# Altium PCB KNX-RELAY-8CH_V2.PcbDoc
Units mm, origin at the board's own origin, x right, y up, seen from the top; angles counter-clockwise.
Board outline 152.4 x 101.6 mm, 2 copper layers (F.Cu, B.Cu); 103 components, 0 nets, 303 pads, 256 vias.
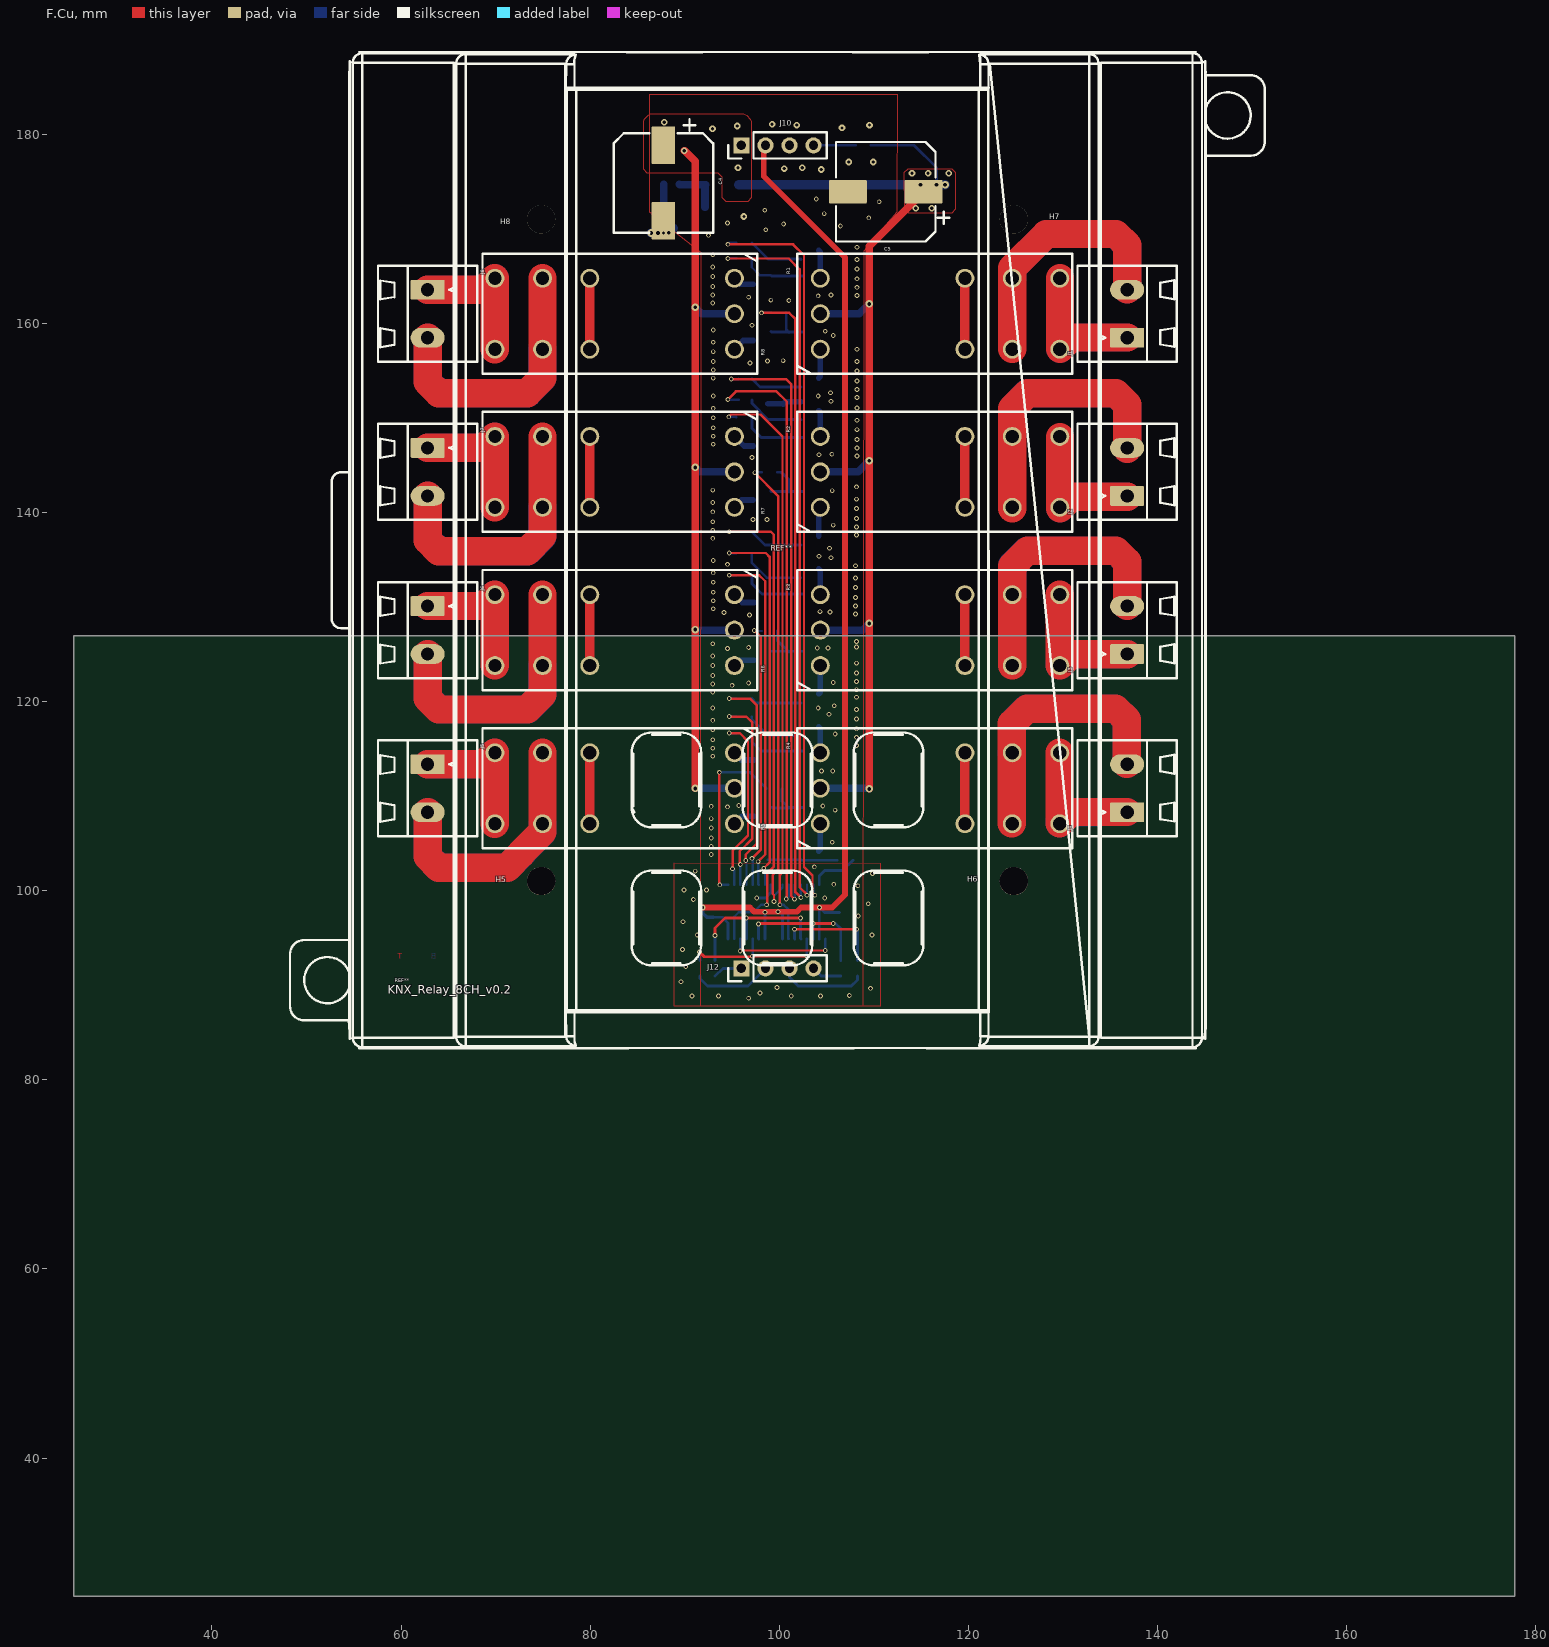
[diagram p0: F.Cu view]
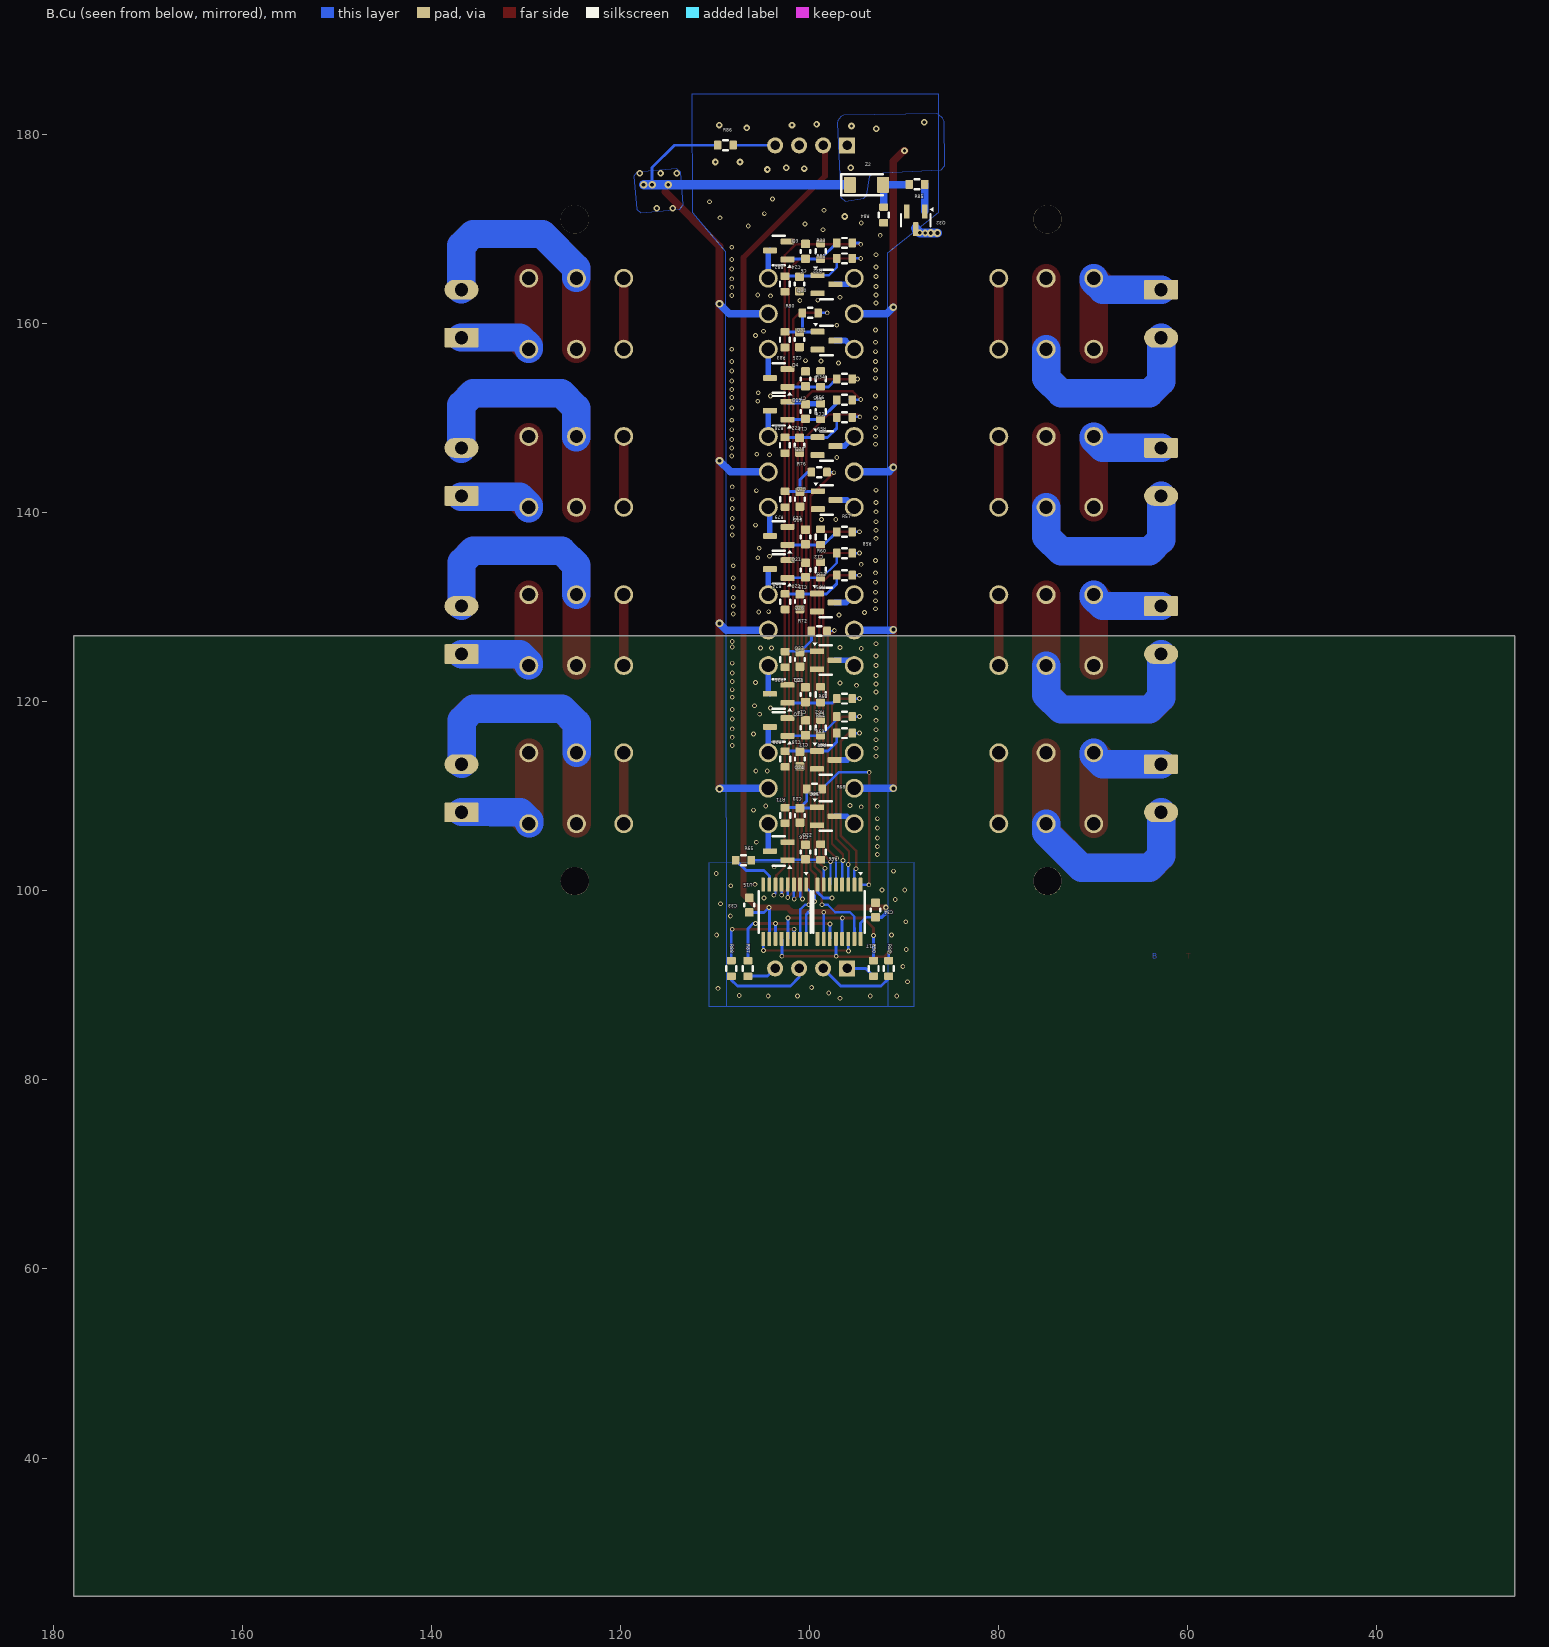
[diagram p1: B.Cu view, seen from below]

## Layer stack, top to bottom
F.Mask: solder mask 0.0102, Solder Resist, Dk 3.5
F.Cu: signal copper 0.0356
Dielectric 1: dielectric 0.32, FR-4, Dk 4.8
B.Cu: signal copper 0.0356
B.Mask: solder mask 0.0102, Solder Resist, Dk 3.5

## Board outline
25.4,25.4 177.8,25.4 177.8,127 25.4,127

## Design rules (kind name [scope] priority, off if disabled: settings)
Clearance "Clearence 0,5_Polygon" [InNamedPolygon('F.Cu-') OR InNamedPolygon('B.Cu-') OR InNamedPolygon('F.Cu--1') OR InNamedPolygon('B.Cu--1')] p1: gap=0.5 ignorepadtopadclearanceinfootprint=FALSE
Clearance "Clearence 0,4_Polygon" [InNamedPolygon('F.Cu--2') OR InNamedPolygon('B.Cu--2')] p2: gap=0.4 ignorepadtopadclearanceinfootprint=FALSE
Clearance "Clearence 0,3_Polygon" [InNamedPolygon('F.Cu--3') OR InNamedPolygon('B.Cu--3')] p3: gap=0.3 ignorepadtopadclearanceinfootprint=FALSE
Clearance "Clearence 0,2_NetClass" [InNetClass('Default')] p4: gap=0.2 ignorepadtopadclearanceinfootprint=FALSE
MinimumSolderMaskSliver [All] p1: minsoldermaskwidth=0
PolygonConnect Polygon_B.Cu--3_ConnectDirect [IsNamedPolygon('B.Cu--3') vs IsVia] p1: connectstyle=Direct reliefconductorwidth=0.254 reliefentries=4 polygonreliefangle="90 Angle" airgapwidth=0.254
PolygonConnect Polygon_B.Cu--3_ConnectRelief45 [IsNamedPolygon('B.Cu--3') vs (IsThruPin or IsSMTPin) and (PadShape_AllLayers = 'Round')] p2: connectstyle=Relief reliefconductorwidth=0.3 reliefentries=4 polygonreliefangle="45 Angle" airgapwidth=0.3
PolygonConnect Polygon_B.Cu--3_ConnectRelief90 [IsNamedPolygon('B.Cu--3') vs (IsThruPin or IsSMTPin) and (PadShape_AllLayers <> 'Round')] p3: connectstyle=Relief reliefconductorwidth=0.3 reliefentries=4 polygonreliefangle="90 Angle" airgapwidth=0.3
PolygonConnect Polygon_F.Cu--3_ConnectDirect [IsNamedPolygon('F.Cu--3') vs IsVia] p4: connectstyle=Direct reliefconductorwidth=0.254 reliefentries=4 polygonreliefangle="90 Angle" airgapwidth=0.254
PolygonConnect Polygon_F.Cu--3_ConnectRelief45 [IsNamedPolygon('F.Cu--3') vs (IsThruPin or IsSMTPin) and (PadShape_AllLayers = 'Round')] p5: connectstyle=Relief reliefconductorwidth=0.3 reliefentries=4 polygonreliefangle="45 Angle" airgapwidth=0.3
PolygonConnect Polygon_F.Cu--3_ConnectRelief90 [IsNamedPolygon('F.Cu--3') vs (IsThruPin or IsSMTPin) and (PadShape_AllLayers <> 'Round')] p6: connectstyle=Relief reliefconductorwidth=0.3 reliefentries=4 polygonreliefangle="90 Angle" airgapwidth=0.3
PolygonConnect Polygon_B.Cu--2_ConnectDirect [IsNamedPolygon('B.Cu--2') vs IsVia] p7: connectstyle=Direct reliefconductorwidth=0.254 reliefentries=4 polygonreliefangle="90 Angle" airgapwidth=0.254
PolygonConnect Polygon_B.Cu--2_ConnectRelief45 [IsNamedPolygon('B.Cu--2') vs (IsThruPin or IsSMTPin) and (PadShape_AllLayers = 'Round')] p8: connectstyle=Relief reliefconductorwidth=0.3 reliefentries=4 polygonreliefangle="45 Angle" airgapwidth=0.3
PolygonConnect Polygon_B.Cu--2_ConnectRelief90 [IsNamedPolygon('B.Cu--2') vs (IsThruPin or IsSMTPin) and (PadShape_AllLayers <> 'Round')] p9: connectstyle=Relief reliefconductorwidth=0.3 reliefentries=4 polygonreliefangle="90 Angle" airgapwidth=0.3
PolygonConnect Polygon_F.Cu--2_ConnectDirect [IsNamedPolygon('F.Cu--2') vs IsVia] p10: connectstyle=Direct reliefconductorwidth=0.254 reliefentries=4 polygonreliefangle="90 Angle" airgapwidth=0.254
PolygonConnect Polygon_F.Cu--2_ConnectRelief45 [IsNamedPolygon('F.Cu--2') vs (IsThruPin or IsSMTPin) and (PadShape_AllLayers = 'Round')] p11: connectstyle=Relief reliefconductorwidth=0.3 reliefentries=4 polygonreliefangle="45 Angle" airgapwidth=0.3
PolygonConnect Polygon_F.Cu--2_ConnectRelief90 [IsNamedPolygon('F.Cu--2') vs (IsThruPin or IsSMTPin) and (PadShape_AllLayers <> 'Round')] p12: connectstyle=Relief reliefconductorwidth=0.3 reliefentries=4 polygonreliefangle="90 Angle" airgapwidth=0.3
PolygonConnect Polygon_B.Cu--1_ConnectDirect [IsNamedPolygon('B.Cu--1') vs IsVia] p13: connectstyle=Direct reliefconductorwidth=0.254 reliefentries=4 polygonreliefangle="90 Angle" airgapwidth=0.254
PolygonConnect Polygon_B.Cu--1_ConnectRelief45 [IsNamedPolygon('B.Cu--1') vs (IsThruPin or IsSMTPin) and (PadShape_AllLayers = 'Round')] p14: connectstyle=Relief reliefconductorwidth=0.5 reliefentries=4 polygonreliefangle="45 Angle" airgapwidth=0.5
PolygonConnect Polygon_B.Cu--1_ConnectRelief90 [IsNamedPolygon('B.Cu--1') vs (IsThruPin or IsSMTPin) and (PadShape_AllLayers <> 'Round')] p15: connectstyle=Relief reliefconductorwidth=0.5 reliefentries=4 polygonreliefangle="90 Angle" airgapwidth=0.5
PolygonConnect Polygon_F.Cu--1_ConnectDirect [IsNamedPolygon('F.Cu--1') vs IsVia] p16: connectstyle=Direct reliefconductorwidth=0.254 reliefentries=4 polygonreliefangle="90 Angle" airgapwidth=0.254
PolygonConnect Polygon_F.Cu--1_ConnectRelief45 [IsNamedPolygon('F.Cu--1') vs (IsThruPin or IsSMTPin) and (PadShape_AllLayers = 'Round')] p17: connectstyle=Relief reliefconductorwidth=0.5 reliefentries=4 polygonreliefangle="45 Angle" airgapwidth=0.5
PolygonConnect Polygon_F.Cu--1_ConnectRelief90 [IsNamedPolygon('F.Cu--1') vs (IsThruPin or IsSMTPin) and (PadShape_AllLayers <> 'Round')] p18: connectstyle=Relief reliefconductorwidth=0.5 reliefentries=4 polygonreliefangle="90 Angle" airgapwidth=0.5
PolygonConnect Polygon_B.Cu-_ConnectDirect [IsNamedPolygon('B.Cu-') vs IsVia] p19: connectstyle=Direct reliefconductorwidth=0.254 reliefentries=4 polygonreliefangle="90 Angle" airgapwidth=0.254
PolygonConnect Polygon_B.Cu-_ConnectRelief45 [IsNamedPolygon('B.Cu-') vs (IsThruPin or IsSMTPin) and (PadShape_AllLayers = 'Round')] p20: connectstyle=Relief reliefconductorwidth=0.5 reliefentries=4 polygonreliefangle="45 Angle" airgapwidth=0.5
PolygonConnect Polygon_B.Cu-_ConnectRelief90 [IsNamedPolygon('B.Cu-') vs (IsThruPin or IsSMTPin) and (PadShape_AllLayers <> 'Round')] p21: connectstyle=Relief reliefconductorwidth=0.5 reliefentries=4 polygonreliefangle="90 Angle" airgapwidth=0.5
PolygonConnect Polygon_F.Cu-_ConnectDirect [IsNamedPolygon('F.Cu-') vs IsVia] p22: connectstyle=Direct reliefconductorwidth=0.254 reliefentries=4 polygonreliefangle="90 Angle" airgapwidth=0.254
PolygonConnect Polygon_F.Cu-_ConnectRelief45 [IsNamedPolygon('F.Cu-') vs (IsThruPin or IsSMTPin) and (PadShape_AllLayers = 'Round')] p23: connectstyle=Relief reliefconductorwidth=0.5 reliefentries=4 polygonreliefangle="45 Angle" airgapwidth=0.5
PolygonConnect Polygon_F.Cu-_ConnectRelief90 [IsNamedPolygon('F.Cu-') vs (IsThruPin or IsSMTPin) and (PadShape_AllLayers <> 'Round')] p24: connectstyle=Relief reliefconductorwidth=0.5 reliefentries=4 polygonreliefangle="90 Angle" airgapwidth=0.5
RoutingVias [All] p1: holewidth=0.711 width=1.27 viastyle="Through Hole" minholewidth=0.711 minwidth=1.27 maxholewidth=0.711 maxwidth=1.27
SilkToSilkClearance [All] p1: silktosilkclearance=0
SilkToSolderMaskClearance [IsPad] p1: minsilkscreentomaskgap=0 clearancetoexposedcopper=TRUE
SolderMaskExpansion [All] p1: expansion=0 istentingtop=FALSE
Width [All] p1: maxlimit=10 minlimit=0.254 preferedwidth=0.2 minimp=50.000000 maximp=50.000000 favimp=50.000000
27 further rules are at their usual default settings.

## Components (designator, comment, footprint, x,y, rotation, side; value= is the part's Value field where it differs from the comment)
C4 "Comment" CP_Elec_10x10 87.747,174.869 r270 top value=1000uf/16V
C5 "Comment" CP_Elec_10x10 111.268,173.944 r180 top value=1000uf/16V
C6 "Comment" C_0603_1608Metric 100.418,167.644 r90 bottom value=100nF
C7 "Comment" C_0603_1608Metric 100.418,154.157 r90 bottom value=100nF
C12 "Comment" C_0603_1608Metric 100.418,137.43 r90 bottom value=100nF
C13 "Comment" C_0603_1608Metric 100.418,150.694 r90 bottom value=100nF
C14 "Comment" C_0603_1608Metric 100.418,120.744 r90 bottom value=100nF
C15 "Comment" C_0603_1608Metric 100.418,133.93 r90 bottom value=100nF
C16 "Comment" C_0603_1608Metric 100.418,104.107 r90 bottom value=100nF
C17 "Comment" C_0603_1608Metric 100.418,117.244 r90 bottom value=100nF
C18 "Comment" C_0603_1608Metric 101.018,113.93 r270 bottom value=100nF
C19 "Comment" C_0603_1608Metric 101.018,107.98 r270 bottom value=100nF
C20 "Comment" C_0603_1608Metric 101.018,130.58 r270 bottom value=100nF
C21 "Comment" C_0603_1608Metric 101.018,124.48 r270 bottom value=100nF
C22 "Comment" C_0603_1608Metric 101.047,147.13 r270 bottom value=100nF
C23 "Comment" C_0603_1608Metric 101.018,141.418 r270 bottom value=100nF
C24 "Comment" C_0603_1608Metric 101.047,164.194 r270 bottom value=100nF
C25 "Comment" C_0603_1608Metric 101.047,158.294 r270 bottom value=100nF
C33 "Comment" C_0603_1608Metric 106.368,98.48 r90 bottom value=100nF/50V
C34 "Comment" C_0603_1608Metric 93.018,97.968 r90 bottom value=100nF/50V
H5 "Comment" MountingHole_3mm 74.818,101.03 r90 top value=MountingHole
H6 "Comment" MountingHole_3mm 124.818,101.03 r90 top value=MountingHole
H7 "Comment" MountingHole_3mm 124.818,171.03 r90 top value=MountingHole
H8 "Comment" MountingHole_3mm 74.818,171.03 r90 top value=MountingHole
J1 "Comment" DG129-5.08-02P 136.807,158.504 r90 top value=DG129-5.08-02P-14-00AH
J2 "Comment" DG129-5.08-02P 136.807,141.771 r90 top value=DG129-5.08-02P-14-00AH
J3 "Comment" DG129-5.08-02P 136.807,125.038 r90 top value=DG129-5.08-02P-14-00AH
J4 "Comment" DG129-5.08-02P 136.807,108.304 r90 top value=DG129-5.08-02P-14-00AH
J5 "Comment" DG129-5.08-02P 62.807,113.384 r270 top value=DG129-5.08-02P-14-00AH
J6 "Comment" DG129-5.08-02P 62.807,130.118 r270 top value=DG129-5.08-02P-14-00AH
J7 "Comment" DG129-5.08-02P 62.807,146.851 r270 top value=DG129-5.08-02P-14-00AH
J8 "Comment" DG129-5.08-02P 62.807,163.584 r270 top value=DG129-5.08-02P-14-00AH
J10 "Comment" PinHeader_1x04_P2.54mm_Vertical 96.008,178.844 r90 top value=Conn_01x04
J12 "Comment" PinHeader_1x04_P2.54mm_Vertical 96.008,91.794 r90 top value=Conn_01x04
Q3 "Comment" SOT-23 103.247,167.732 r180 bottom value=2N7002ET1G
Q4 "Comment" SOT-23 103.247,154.244 r180 bottom value=2N7002ET1G
Q18 "Comment" SOT-23 103.247,137.532 r180 bottom value=2N7002ET1G
Q19 "Comment" SOT-23 103.247,150.782 r180 bottom value=2N7002ET1G
Q20 "Comment" SOT-23 103.247,120.832 r180 bottom value=2N7002ET1G
Q21 "Comment" SOT-23 103.247,134.032 r180 bottom value=2N7002ET1G
Q22 "Comment" SOT-23 103.247,104.194 r180 bottom value=2N7002ET1G
Q23 "Comment" SOT-23 103.247,117.332 r180 bottom value=2N7002ET1G
Q24 "Comment" SOT-23 98.268,113.843 r0 bottom value=2N7002ET1G
Q25 "Comment" SOT-23 98.268,107.893 r0 bottom value=2N7002ET1G
Q26 "Comment" SOT-23 98.268,130.493 r0 bottom value=2N7002ET1G
Q27 "Comment" SOT-23 98.268,124.393 r0 bottom value=2N7002ET1G
Q28 "Comment" SOT-23 98.197,147.043 r0 bottom value=2N7002ET1G
Q29 "Comment" SOT-23 98.168,141.33 r0 bottom value=2N7002ET1G
Q30 "Comment" SOT-23 98.197,164.144 r0 bottom value=2N7002ET1G
Q31 "Comment" SOT-23 98.197,158.207 r0 bottom value=2N7002ET1G
Q32 "Comment" SOT-23 88.76,170.923 r90 bottom value=2N7002ET1G
R1 "Comment" RELAY9-500X1142_618 104.347,161.044 r0 top value=RT314F12
R2 "Comment" RELAY9-500X1142_618 104.347,144.311 r0 top value=RT314F12
R3 "Comment" RELAY9-500X1142_618 104.347,127.578 r0 top value=RT314F12
R4 "Comment" RELAY9-500X1142_618 104.347,110.844 r0 top value=RT314F12
R5 "Comment" RELAY9-500X1142_618 95.267,110.844 r180 top value=RT314F12
R6 "Comment" RELAY9-500X1142_618 95.267,127.578 r180 top value=RT314F12
R7 "Comment" RELAY9-500X1142_618 95.267,144.311 r180 top value=RT314F12
R8 "Comment" RELAY9-500X1142_618 95.267,161.044 r180 top value=RT314F12
R32 "Comment" R_0603_1608Metric 98.818,167.644 r90 bottom value=10K
R33 "Comment" R_0603_1608Metric 96.289,168.53 r0 bottom value=1K
R34 "Comment" R_0603_1608Metric 96.289,154.157 r0 bottom value=1K
R35 "Comment" R_0603_1608Metric 98.818,154.157 r90 bottom value=10K
R56 "Comment" R_0603_1608Metric 96.289,151.93 r0 bottom value=1K
R57 "Comment" R_0603_1608Metric 96.289,137.966 r0 bottom value=1K
R58 "Comment" R_0603_1608Metric 98.818,137.43 r90 bottom value=10K
R59 "Comment" R_0603_1608Metric 98.818,150.694 r90 bottom value=10K
R60 "Comment" R_0603_1608Metric 96.289,135.716 r0 bottom value=1K
R61 "Comment" R_0603_1608Metric 96.289,120.33 r0 bottom value=1K
R62 "Comment" R_0603_1608Metric 98.818,120.744 r90 bottom value=10K
R63 "Comment" R_0603_1608Metric 98.818,133.93 r90 bottom value=10K
R64 "Comment" R_0603_1608Metric 96.289,118.43 r0 bottom value=1K
R65 "Comment" R_0603_1608Metric 106.968,103.23 r180 bottom value=1K
R66 "Comment" R_0603_1608Metric 98.818,104.107 r90 bottom value=10K
R67 "Comment" R_0603_1608Metric 98.818,117.244 r90 bottom value=10K
R68 "Comment" R_0603_1608Metric 99.468,110.78 r0 bottom value=1K
R69 "Comment" R_0603_1608Metric 96.289,116.68 r0 bottom value=1K
R70 "Comment" R_0603_1608Metric 102.568,113.93 r270 bottom value=10K
R71 "Comment" R_0603_1608Metric 102.568,107.98 r270 bottom value=10K
R72 "Comment" R_0603_1608Metric 98.968,127.48 r0 bottom value=1K
R73 "Comment" R_0603_1608Metric 96.289,133.38 r0 bottom value=1K
R74 "Comment" R_0603_1608Metric 102.568,130.58 r270 bottom value=10K
R75 "Comment" R_0603_1608Metric 102.568,124.48 r270 bottom value=10K
R76 "Comment" R_0603_1608Metric 98.968,144.28 r0 bottom value=1K
R77 "Comment" R_0603_1608Metric 96.289,150.08 r0 bottom value=1K
R78 "Comment" R_0603_1608Metric 102.597,147.13 r270 bottom value=10K
R79 "Comment" R_0603_1608Metric 102.568,141.418 r270 bottom value=10K
R80 "Comment" R_0603_1608Metric 99.918,161.13 r0 bottom value=1K
R81 "Comment" R_0603_1608Metric 96.289,166.894 r0 bottom value=1K
R82 "Comment" R_0603_1608Metric 102.597,164.194 r270 bottom value=10K
R83 "Comment" R_0603_1608Metric 102.597,158.294 r270 bottom value=10K
R84 "Comment" R_0603_1608Metric 92.147,171.494 r270 bottom value=10K
R85 "Comment" R_0603_1608Metric 88.622,174.723 r180 bottom value=10K
R86 "Comment" R_0603_1608Metric 108.897,178.869 r0 bottom value=0R
R87 "Comment" R_0603_1608Metric 106.518,91.794 r270 bottom value=33R
R88 "Comment" R_0603_1608Metric 108.268,91.794 r270 bottom value=33R
R89 "Comment" R_0603_1608Metric 91.618,91.794 r270 bottom value=33R
R90 "Comment" R_0603_1608Metric 93.218,91.794 r270 bottom value=33R
REF** "Comment" LayerMarker_4_6.35x2.54mm_TextH1mm_P1.27mm_Named_BottomMirrored 59.792,91.599 r0 top value=LayerMarker_4_6.35x2.54mm_TextH1mm_P1.27mm_Named_BottomMirrored
REF** "Comment" WEEE-Logo_4.2x6mm_SilkScreen 99.812,136.03 r0 top value=WEEE-Logo_4.2x6mm_SilkScreen
U15 "Comment" TSSOP-16_4.4x5mm_P0.65mm 102.618,97.78 r90 bottom value=74HC595PW,118
U17 "Comment" TSSOP-16_4.4x5mm_P0.65mm 96.868,97.78 r90 bottom value=74HC595PW,118
Z2 "Comment" D_MiniMELF 93.972,174.669 r0 bottom value=6.8V

## Footprints (in the part's own frame and the unit in brackets; to place one, negate y for a bottom-side part, rotate by r counter-clockwise, add the part's x,y. Pads: shape width x height; smd on the part's side, far side on the other; paste and mask are expansions set on the pad)
C_0603_1608Metric [mm]
  rrect25% 0.9x0.95 smd mask+0: 1(0.775,0) 2(-0.775,0)
  silkscreen extent -0.14,-0.51 0.14,0.51
CP_Elec_10x10 [mm]
  rrect10% 4x2.5 smd mask+0: 1(-4,0) 2(4,0)
  silkscreen extent -6.75,-5.26 5.26,5.26
D_MiniMELF [mm]
  rrect19% 1.3x1.7 smd mask+0: 1(1.75,0) 2(-1.75,0)
  silkscreen extent -1.75,-1.11 2.66,1.11
DG129-5.08-02P [mm]
  rrect12% 2.1x3.6 hole 1.4 mask+0: 1(0,0)
  rrect100% 2.1x3.6 hole 1.4 mask+0: 2(5.08,0)
  silkscreen extent -2.54,-5.25 7.62,5.25
LayerMarker_4_6.35x2.54mm_TextH1mm_P1.27mm_Named_BottomMirrored [mm]
MountingHole_3mm [mm]
  round 3 hole 3 mask+0: Un1(0,0)
PinHeader_1x04_P2.54mm_Vertical [mm]
  rect 1.7x1.7 hole 1 mask+0: 1(0,0)
  round 1.7 hole 1 mask+0: 2(0,-2.54) 3(0,-5.08) 4(0,-7.62)
  silkscreen extent -1.38,-9 1.38,1.38
R_0603_1608Metric [mm]
  rrect25% 0.8x0.95 smd mask+0: 1(0.825,0) 2(-0.825,0)
  silkscreen extent -0.24,-0.52 0.24,0.52
RELAY9-500X1142_618 [mm]
  round 2 hole 1.4 mask+0: 11(20.3,-3.75) 11(20.3,3.75) 12(15.3,-3.75) 12(15.3,3.75) 14(25.34,-3.75) 14(25.34,3.75) A1(0,-3.75) A2(0,3.75) A3(0,0)
  silkscreen extent -2.42,-6.35 26.65,6.35
SOT-23 [mm]
  rrect25% 1.475x0.6 smd mask+0: 1(0.937,-0.95) 2(0.937,0.95) 3(-0.937,0)
  silkscreen extent -0.65,-1.84 1.4,1.56
TSSOP-16_4.4x5mm_P0.65mm [mm]
  rrect25% 1.475x0.4 smd mask+0: 1(2.863,-2.275) 2(2.863,-1.625) 3(2.863,-0.975) 4(2.863,-0.325) 5(2.863,0.325) 6(2.863,0.975) 7(2.863,1.625) 8(2.863,2.275) 9(-2.863,2.275) 10(-2.863,1.625) 11(-2.863,0.975) 12(-2.863,0.325) 13(-2.863,-0.325) 14(-2.863,-0.975) 15(-2.863,-1.625) 16(-2.863,-2.275)
  silkscreen extent -2.2,-2.74 4.19,2.74
WEEE-Logo_4.2x6mm_SilkScreen [mm]
  silkscreen extent -51.56,-52.7 51.56,52.7

## Part data
C4 C5: library part CP_Elec_10x10, "SMD capacitor, aluminum electrolytic, Nichicon, 10.0x10.0mm", Description="CAP.EL.1000uF 16V 10x10 105C 5000H SMT", MP=CDL016M102G10PKKKV00R, MF=SUSCON, Package=CP_Elec_10x10, OZD=CDL016M102G10PKKKV00R, ki_fp_filters=C_*
C6 C7 C12 C13 C14 C15 C16 C17 C18 C19 C20 C21 C22 C23 C24 C25 C33 C34: library part C_0603_1608Metric, "Capacitor SMD 0603 (1608 Metric), square (rectangular) end terminal, IPC-7351 nominal, (Body size source: IPC-SM-782 page 76, https://www.pcb-3d.com/wordpress/wp-content/uploads/ipc-sm-782a_amendment_1_and_2.pdf), generated with kicad-footprint-generator", Package=C_0603, MP=CC0603KRX7R9BB104, MF=YAGEO, ki_fp_filters=C_*
  C6 C7 C12 C13 C14 C15 C16 C17 C18 C19 C20 C21 C22 C23 C24 C25: Description="CAP CER 100nF 50V X7R 0603"
  C33 C34: Description="50V 100nF X7R ±5% 0603 Multilayer Ceramic Capacitors MLCC - SMD/SMT ROHS"
H5 H6 H7 H8: library part MountingHole_3mm, "Mounting Hole 3mm, no annular", Description="Mounting Hole without connection", ki_fp_filters=MountingHole*
J1 J2 J3 J4 J5 J6 J7 J8: library part DG129-5.08-02P, "Generic Phoenix Contact connector footprint for: GMSTBA_2,5/2-G-7,62; number of pins: 02; pin pitch: 7.62mm; Angled", Package="THT V/T  5.08mm", Description="TERM.BLK.5.08MM 2P PCB TYPE 2 BOY GREEN", MP=DG129-5.08-02P-14-00AH, MF=DEGSON, OZD=DG129-5.08-02P-14-00AH, ki_fp_filters=TerminalBlock*:*
J10 J12: library part PinHeader_1x04_P2.54mm_Vertical, "Through hole straight pin header, 1x04, 2.54mm pitch, single row", Description="Generic connector, single row, 01x04, script generated (kicad-library-utils/schlib/autogen/connector/)", ki_fp_filters=Connector*:*_1x??_*
Q3 Q4 Q18 Q19 Q20 Q21 Q22 Q23 Q24 Q25 Q26 Q27 Q28 Q29 Q30 Q31 Q32: library part SOT-23, "SOT, 3 Pin (JEDEC TO-236 Var AB https://www.jedec.org/document_search?search_api_views_fulltext=TO-236), generated with kicad-footprint-generator ipc_gullwing_generator.py", Description="MOSFET N-CH 60V 310mA SOT-23", MP=2N7002ET1G, MF=onsemi, Package=SOT-23, OZD=2N7002ET1G
R1 R2 R3 R4 R5 R6 R7 R8: library part RELAY9-500X1142_618, Package=DIP,29x12.7mm, Datasheet=https://www.te.com/commerce/DocumentDelivery/DDEController?Action=srchrtrv&DocNm=RT1_bistable&DocType=DS&DocLang=English, Description="RELAY POWER SPDT-CO 16A 12V", MP=RT314F12, MF="TE Connectivity", OZD=RT314F12, ki_fp_filters=Relay*SPDT*Schrack*RT1*16A*FormC*RM5mm*
R32 R33 R34 R35 R56 R57 R58 R59 R60 R61 R62 R63 R64 R65 R66 R67 R68 R69 R70 R71 R72 R73 R74 R75 R76 R77 R78 R79 R80 R81 R82 R83 R84 R85 R86 R87 R88 R89 R90: library part R_0603_1608Metric, "Resistor SMD 0603 (1608 Metric), square (rectangular) end terminal, IPC-7351 nominal, (Body size source: IPC-SM-782 page 72, https://www.pcb-3d.com/wordpress/wp-content/uploads/ipc-sm-782a_amendment_1_and_2.pdf), generated with kicad-footprint-generator", Package=R_0603, ki_fp_filters=R_*
  R32 R35 R58 R59 R62 R63 R66 R67 R70 R71 R74 R75 R78 R79 R82 R83 R84 R85: Description="100mW Thick Film Resistors 75V ±100ppm/℃ ±5% 10kΩ 0603 Chip Resistor - Surface Mount ROHS", MP=FRC0603J103TS, MF=FOJAN
  R33 R34 R56 R57 R60 R61 R64 R65 R68 R69 R72 R73 R76 R77 R80 R81: Description="RES 1kΩ ±5% 100mW 0603", MP=RC0603JR-071KL, MF=YAGEO, OZD=RC0603JR-071KL
  R87 R88 R89 R90: Description="RES 33Ω ±5% 100mW 0603", MP=RC0603JR-0733RL, MF=YAGEO, OZD=RC0603JR-0733RL
REF**: library part LayerMarker_4_6.35x2.54mm_TextH1mm_P1.27mm_Named_BottomMirrored, "Layer marker, 4 layers, layer names, text size 1mm, pitch 1.27mm, margin 1.27mm"
REF**: library part WEEE-Logo_4.2x6mm_SilkScreen, "Waste Electrical and Electronic Equipment Directive"
U15 U17: library part TSSOP-16_4.4x5mm_P0.65mm, "TSSOP, 16 Pin (https://www.jedec.org/document_search?search_api_views_fulltext=MO-153), generated with kicad-footprint-generator ipc_gullwing_generator.py", Package=TSSOP-16, Datasheet=http://www.ti.com/lit/ds/symlink/sn74hc595.pdf, Description="8-bit serial-in, serial or parallel-out shift register with output latches; 3-state", MP=74HC595PW,118, MF=Nexperia, ki_fp_filters="DIP*W7.62mm* SOIC*3.9x9.9mm*P1.27mm* TSSOP*4.4x5mm*P0.65mm* SOIC*5.3x10.2mm*P1.27mm* SOIC*7.5x10.3mm*P1.27mm*"
Z2: library part D_MiniMELF, "Diode Mini-MELF (SOD-80)", Description="DIODE ZENER 500mW 6.8V ±5% SOD80 (MINIMELF) SMT", MP=ZMM55-C6V8_R1_10001, MF=PANJIT, Package=D_MiniMELF, OZD=ZMM55-C6V8_R1_10001, ki_fp_filters="TO-???* *_Diode_* *SingleDiode* D_*"

## Via types
v1: diameter 0.5, hole 0.3, F.Cu to B.Cu, tented both sides, 220 vias
v2: diameter 0.7, hole 0.35, F.Cu to B.Cu, tented both sides, 22 vias
v3: diameter 0.8, hole 0.4, F.Cu to B.Cu, tented both sides, 13 vias
v4: diameter 0.6, hole 0.3, F.Cu to B.Cu, tented both sides, 1 vias

## Nets (pads, with @x,y where several pads share a name; then routed paths per layer and width w, separated by ;. In a path a pad name is that pad's centre, name@x,y a point inside that pad or via, vN(x,y) a via of type N, cw(c..) or ccw(c..) an arc to the next point about the centre after c; other vN are vias at no path point)
pads on no net: C4.1 C4.2 C5.1 C5.2 C6.1 C6.2 C7.1 C7.2 C12.1 C12.2 C13.1 C13.2 C14.1 C14.2 C15.1 C15.2 C16.1 C16.2 C17.1 C17.2 C18.1 C18.2 C19.1 C19.2 C20.1 C20.2 C21.1 C21.2 C22.1 C22.2 C23.1 C23.2 C24.1 C24.2 C25.1 C25.2 C33.1 C33.2 C34.1 C34.2 H5.Un1 H6.Un1 H7.Un1 H8.Un1 J1.1 J1.2 J2.1 J2.2 J3.1 J3.2 J4.1 J4.2 J5.1 J5.2 J6.1 J6.2 J7.1 J7.2 J8.1 J8.2 J10.1 J10.2 J10.3 J10.4 J12.1 J12.2 J12.3 J12.4 Q3.1 Q3.2 Q3.3 Q4.1 Q4.2 Q4.3 Q18.1 Q18.2 Q18.3 Q19.1 Q19.2 Q19.3 Q20.1 Q20.2 Q20.3 Q21.1 Q21.2 Q21.3 Q22.1 Q22.2 Q22.3 Q23.1 Q23.2 Q23.3 Q24.1 Q24.2 Q24.3 Q25.1 Q25.2 Q25.3 Q26.1 Q26.2 Q26.3 Q27.1 Q27.2 Q27.3 Q28.1 Q28.2 Q28.3 Q29.1 Q29.2 Q29.3 Q30.1 Q30.2 Q30.3 Q31.1 Q31.2 Q31.3 Q32.1 Q32.2 Q32.3 R1.11 R1.12 R1.14 R1.A1 R1.A2 R1.A3 R2.11 R2.12 R2.14 R2.A1 R2.A2 R2.A3 R3.11 R3.12 R3.14 R3.A1 R3.A2 R3.A3 R4.11 R4.12 R4.14 R4.A1 R4.A2 R4.A3 R5.11 R5.12 R5.14 R5.A1 R5.A2 R5.A3 R6.11 R6.12 R6.14 R6.A1 R6.A2 R6.A3 R7.11 R7.12 R7.14 R7.A1 R7.A2 R7.A3 R8.11 R8.12 R8.14 R8.A1 R8.A2 R8.A3 R32.1 R32.2 R33.1 R33.2 R34.1 R34.2 R35.1 R35.2 R56.1 R56.2 R57.1 R57.2 R58.1 R58.2 R59.1 R59.2 R60.1 R60.2 R61.1 R61.2 R62.1 R62.2 R63.1 R63.2 R64.1 R64.2 R65.1 R65.2 R66.1 R66.2 R67.1 R67.2 R68.1 R68.2 R69.1 R69.2 R70.1 R70.2 R71.1 R71.2 R72.1 R72.2 R73.1 R73.2 R74.1 R74.2 R75.1 R75.2 R76.1 R76.2 R77.1 R77.2 R78.1 R78.2 R79.1 R79.2 R80.1 R80.2 R81.1 R81.2 R82.1 R82.2 R83.1 R83.2 R84.1 R84.2 R85.1 R85.2 R86.1 R86.2 R87.1 R87.2 R88.1 R88.2 R89.1 R89.2 R90.1 R90.2 U15.1 U15.2 U15.3 U15.4 U15.5 U15.6 U15.7 U15.8 U15.9 U15.10 U15.11 U15.12 U15.13 U15.14 U15.15 U15.16 U17.1 U17.2 U17.3 U17.4 U17.5 U17.6 U17.7 U17.8 U17.9 U17.10 U17.11 U17.12 U17.13 U17.14 U17.15 U17.16 Z2.1 Z2.2
copper on no net: | length 1920.6
  F.Cu w0.254: v1(93.668,112.53) 93.668,101.53 93.668,100.68 v1(93.718,100.63) ; v1(94.568,151.98) 95.418,152.83 99.718,152.83 100.798,151.75 100.798,151.48 100.798,151.58 100.798,99.183 v1(100.745,99.13) ; v1(94.568,166.88) 101.013,166.88 102.163,165.73 102.163,100.38 102.943,99.6 v1(102.943,99.53) ; v1(94.568,168.38) 101.468,168.38 102.618,167.23 102.618,102.53 103.52,101.628 103.52,99.778 v1(103.768,99.53) ; v1(94.668,150.13) 94.918,150.38 98.018,150.38 100.343,148.055 100.343,101.955 100.068,101.68 v1(100.068,98.531) ; v1(94.718,116.68) 95.818,116.68 96.703,115.795 96.703,105.865 95.068,104.23 v1(95.068,102.33) ; v1(94.718,118.43) 96.518,118.43 97.158,117.79 97.158,105.52 95.819,104.18 95.819,102.855 v1(95.893,102.78) ; v1(94.718,120.33) 96.918,120.33 97.613,119.635 97.613,104.981 96.457,103.825 v1(96.457,103.195) ; v1(94.718,133.38) 97.878,133.38 98.523,132.735 98.523,104.195 98.523,103.838 v1(97.77,103.085) ; v1(94.718,135.73) 98.568,135.73 98.978,135.32 98.978,104.294 98.978,102.99 v1(98.368,102.38) ; v1(94.718,137.98) 99.118,137.98 99.433,137.665 99.433,102.58 98.718,101.865 98.718,98.581 v1(98.668,98.531) ; v1(94.918,154.13) 100.718,154.13 101.253,153.595 101.253,99.47 v1(101.61,99.114) ; v1(95.868,93.63) 95.918,93.68 v1(104.868,93.68) ; v1(97.12,103.43) 98.068,104.378 98.068,105.28 98.068,126.83 v1(97.368,127.53) ; v1(97.418,144.23) 99.888,141.76 99.888,102.23 99.318,101.66 99.318,99.685 99.453,99.55 v1(99.453,98.865) ; v1(98.118,161.13) 101.058,161.13 101.708,160.48 101.708,99.86 v1(102.29,99.279)
  F.Cu w0.3: v1(91.568,93.53) 92.068,93.03 97.118,93.03 v1(97.168,93.08) v1(102.918,93.08) ; v1(93.218,95.28) 93.218,96.08 94.268,97.13 v1(96.518,97.13) v1(102.268,97.13) ; v1(97.818,96.48) 97.868,96.53 v1(103.593,96.53) v1(105.718,96.53) ; v1(101.618,95.93) v1(108.168,95.93)
  F.Cu w0.6: v4(91.918,98.23) 96.918,98.23 97.367,97.781 99.169,97.781 99.17,97.78 v1(99.868,97.78) 99.869,97.781 101.869,97.781 102.318,98.23 v1(104.268,98.23) 105.618,98.23 106.968,99.58 106.968,166.98 98.352,175.596 98.352,178.894
  F.Cu w0.8: v2(89.947,178.294) 90.004,178.294 91.118,177.18 v3(91.118,161.73) v3(91.118,144.78) v3(91.118,127.63) v3(91.118,110.83) ; v3(109.518,110.78) 109.518,112.53 v3(109.518,128.28) v3(109.518,145.48) v3(109.518,162.08) 109.518,168.194 115.268,173.944
  F.Cu w1: 79.967,107.094 79.967,114.594 ; 79.967,123.828 79.967,131.328 ; 79.967,140.561 79.967,148.061 ; 79.967,157.294 79.967,164.794 ; 119.647,107.094 119.647,114.594 ; 119.647,123.828 119.647,131.328 ; 119.647,140.561 119.647,148.061 ; 119.647,157.294 119.647,164.794
  F.Cu w3: 62.807,108.304 62.807,103.631 63.996,102.442 71.23,102.442 72.718,103.93 72.718,103.992 74.967,106.241 74.967,107.094 74.967,114.594 ; 62.807,113.384 68.717,113.384 69.927,114.594 69.927,107.094 ; 62.807,125.038 62.807,120.364 63.996,119.175 73.346,119.175 74.967,120.796 74.967,123.828 74.967,131.328 ; 62.807,130.118 68.717,130.118 69.927,131.328 69.927,123.828 ; 62.807,141.771 62.807,137.097 63.996,135.909 73.346,135.909 74.967,137.53 74.967,140.561 74.967,148.061 ; 62.807,146.851 68.717,146.851 69.927,148.061 69.927,140.561 ; 62.807,158.504 62.807,153.831 63.996,152.642 73.346,152.642 74.967,154.263 74.967,157.294 74.967,164.794 ; 62.807,163.584 68.717,163.584 69.927,164.794 69.927,157.294 ; 124.608,107.12 124.608,114.62 124.608,117.651 126.229,119.273 135.579,119.273 136.768,118.084 136.768,113.41 ; 124.647,123.828 124.647,131.328 124.647,134.359 126.268,135.98 135.618,135.98 136.807,134.791 136.807,130.118 ; 124.658,140.47 124.658,147.97 124.658,151.001 126.279,152.623 135.629,152.623 136.818,151.434 136.818,146.76 ; 124.658,157.32 124.658,165.87 128.261,169.473 135.629,169.473 136.818,168.284 136.818,163.61 ; 129.648,114.62 129.648,107.12 130.858,108.33 136.768,108.33 ; 129.687,131.328 129.687,123.828 130.897,125.038 136.807,125.038 ; 129.698,147.97 129.698,140.47 130.908,141.68 136.818,141.68 ; 129.698,164.82 129.698,157.32 130.908,158.53 136.818,158.53
  B.Cu w0.254: v1(93.668,112.53) 96.918,112.53 97.418,112.03 98.643,110.805 98.643,110.78 ; v1(93.718,100.63) 94.581,100.63 94.593,100.643 ; v1(94.568,151.98) 94.593,151.955 95.718,151.955 95.743,151.93 ; v1(94.568,166.88) 94.583,166.894 95.443,166.894 ; v1(94.668,150.13) 95.414,150.13 95.464,150.08 ; v1(94.718,116.68) 95.464,116.68 ; v1(94.718,118.43) 95.464,118.43 ; v1(94.718,120.33) 95.464,120.33 ; v1(94.718,133.38) 95.464,133.38 ; v1(94.718,135.73) 94.733,135.716 95.464,135.716 ; v1(94.718,137.98) 94.733,137.966 95.464,137.966 ; v1(94.918,154.13) 95.667,154.13 95.693,154.157 ; v1(95.068,102.33) 95.243,102.155 95.243,100.643 ; 95.218,96.03 95.218,94.943 95.243,94.918 95.243,97.255 95.718,97.73 97.268,97.73 98.069,98.531 v1(98.668,98.531) ; v1(95.868,93.63) 95.893,93.655 95.893,94.918 ; 95.893,100.643 v1(95.893,102.78) ; v1(96.457,103.195) 96.543,103.109 96.543,100.643 ; 97.093,166.98 97.093,165.955 97.954,165.094 99.135,165.094 ; 97.114,118.43 97.114,118.123 98.818,116.419 102.272,116.419 102.31,116.382 ; 97.114,135.716 97.114,134.684 98.693,133.105 98.818,133.105 102.286,133.105 102.31,133.082 ; v1(97.12,103.43) 97.193,103.357 97.193,100.643 ; v1(97.368,127.53) 97.418,127.48 98.143,127.48 ; v1(97.418,144.23) 97.468,144.28 98.143,144.28 ; v1(97.77,103.085) 97.77,100.716 97.843,100.643 ; v1(98.118,161.13) 99.093,161.13 ; v1(98.368,102.38) 98.493,102.255 98.493,100.643 ; v1(99.453,98.865) 99.453,99.474 100.343,100.364 100.343,100.643 ; v1(100.068,98.531) 100.467,98.531 100.968,98.03 100.968,94.943 100.993,94.918 ; v1(100.745,99.13) 100.993,99.378 100.993,100.643 ; v1(101.61,99.114) 101.643,99.148 101.643,100.643 ; v1(102.29,99.279) 102.293,99.282 102.293,100.643 ; v1(102.943,99.53) 102.943,100.643 ; 103.593,100.643 103.593,99.705 v1(103.768,99.53) ; v1(104.868,93.68) 104.868,94.893 104.893,94.918
  B.Cu w0.3: v1(91.568,93.53) 91.618,93.48 91.618,92.619 ; 91.618,90.969 91.618,90.73 92.418,89.93 96.684,89.93 98.548,91.794 ; 93.018,97.193 94.006,97.193 94.593,96.605 94.593,94.918 ; 93.218,90.969 94.043,91.794 96.008,91.794 ; 93.218,92.619 v1(93.218,95.28) ; v1(94.568,168.38) 94.718,168.53 95.464,168.53 ; v1(96.518,97.13) 96.543,97.105 96.543,94.918 ; 97.114,116.68 97.114,115.734 98.056,114.793 99.206,114.793 102.531,114.793 102.568,114.755 ; 97.114,120.33 97.563,119.882 102.31,119.882 ; 97.114,133.38 97.114,132.484 98.193,131.405 102.568,131.405 ; 97.114,137.966 98.498,136.582 102.31,136.582 ; 97.114,150.08 97.114,148.934 98.093,147.955 102.597,147.955 ; 97.114,151.93 97.114,151.573 98.818,149.869 102.272,149.869 102.31,149.832 ; 97.114,154.157 97.977,153.294 102.31,153.294 ; 97.114,168.53 97.114,168.523 98.818,166.819 102.272,166.819 102.31,166.782 ; v1(97.168,93.08) 97.193,93.105 97.193,94.918 ; v1(97.618,99.23) 98.533,99.23 99.143,99.84 99.143,100.643 ; v1(97.818,96.48) 97.818,94.943 97.843,94.918 ; 98.493,94.918 v1(98.493,97.73) ; 98.818,103.282 102.272,103.282 102.31,103.244 102.324,103.23 106.143,103.23 ; 99.106,142.28 99.143,142.243 102.568,142.243 ; 99.135,159.157 99.172,159.119 102.597,159.119 ; 99.135,165.094 99.21,165.019 102.597,165.019 ; 99.206,108.843 99.293,108.755 101.018,108.755 ; 99.206,125.343 102.531,125.343 102.568,125.305 ; 99.793,127.48 99.793,126.48 101.018,125.255 ; 99.793,144.28 100.218,144.28 101.018,143.48 101.018,142.193 ; v1(99.868,97.78) 100.068,97.78 100.343,97.505 100.343,94.918 ; 100.293,110.78 100.293,109.48 101.018,108.755 ; 100.743,161.13 100.743,159.373 101.047,159.069 ; 101.088,91.794 101.088,90.86 102.018,89.93 107.618,89.93 108.268,90.58 108.268,90.969 ; v1(101.618,95.93) 101.618,94.943 101.643,94.918 ; v1(102.268,97.13) 102.268,94.943 102.293,94.918 ; 102.568,108.805 101.068,108.805 101.018,108.755 ; v1(102.918,93.08) 102.918,94.893 102.943,94.918 ; 103.432,178.894 103.457,178.869 108.072,178.869 ; 103.593,94.918 v1(103.593,96.53) ; 103.628,91.794 104.453,90.969 106.518,90.969 ; 104.243,94.918 104.243,98.205 v1(104.268,98.23) 104.793,97.705 106.368,97.705 ; 104.243,100.643 104.243,101.555 104.818,102.13 106.693,102.13 107.793,103.23 ; v1(105.718,96.53) 105.968,96.53 106.518,95.98 106.518,92.619 ; v1(108.168,95.93) 108.268,95.83 108.268,92.619 ; 109.722,178.869 114.272,178.869 116.647,176.494 v3(116.647,174.694)
  B.Cu w0.4: v4(91.918,98.23) 91.918,97.63 92.356,97.193 93.018,97.193
  B.Cu w0.6: 95.267,107.094 96.065,107.893 97.331,107.893 ; 95.267,114.594 96.019,113.843 97.331,113.843 ; 95.267,123.828 95.832,124.393 97.331,124.393 ; 95.267,131.328 96.102,130.493 97.331,130.493 ; 95.267,140.561 96.036,141.33 97.231,141.33 ; 95.267,148.061 96.286,147.043 97.26,147.043 ; 95.267,157.294 96.18,158.207 97.26,158.207 ; 95.267,164.794 95.917,164.144 97.26,164.144 ; 98.818,151.519 100.368,151.519 100.418,151.469 100.681,151.732 102.31,151.732 ; 104.185,104.194 104.347,104.357 104.347,107.094 ; 104.185,117.332 104.347,117.169 104.347,114.594 ; 104.185,120.832 104.347,120.994 104.347,123.828 ; 104.185,134.032 104.347,133.869 104.347,131.328 ; 104.185,137.532 104.185,140.399 104.347,140.561 ; 104.185,150.782 104.347,150.619 104.347,148.061 ; 104.185,154.244 104.347,154.407 104.347,157.294 ; 104.185,167.732 104.347,167.569 104.347,164.794
  B.Cu w0.8: 87.797,171.873 87.797,174.723 ; 89.447,174.723 89.5,174.669 92.222,174.669 92.147,174.594 92.147,172.319 ; v3(91.118,110.83) 95.253,110.83 95.267,110.844 ; v3(91.118,127.63) 91.171,127.578 95.267,127.578 ; v3(91.118,144.78) 91.587,144.311 95.267,144.311 ; v3(91.118,161.73) 91.804,161.044 95.267,161.044 ; 104.347,110.844 109.454,110.844 v3(109.518,110.78) ; 104.347,127.578 108.816,127.578 v3(109.518,128.28) ; 104.347,144.311 108.349,144.311 v3(109.518,145.48) ; 104.347,161.044 108.483,161.044 v3(109.518,162.08)
  B.Cu w1: v3(86.468,169.58) v3(87.168,169.58) v2(87.768,169.58) 88.29,169.58 v2(88.329,169.619) 88.781,170.071 ; 95.722,174.669 113.022,174.669 113.047,174.694 v3(114.947,174.694) v3(116.647,174.694) v3(117.547,174.694)
  B.Cu w3: 62.807,108.304 62.807,103.681 64.046,102.442 71.23,102.442 74.967,106.179 74.967,107.094 ; 62.807,113.384 65.938,113.384 65.946,113.392 68.996,113.392 69.927,114.323 69.927,114.594 ; 62.807,125.038 62.807,120.414 64.046,119.175 73.396,119.175 74.946,120.725 74.946,123.806 74.967,123.828 ; 62.807,130.118 65.938,130.118 65.946,130.125 68.996,130.125 69.927,131.056 69.927,131.328 ; 62.807,141.771 62.807,137.147 64.046,135.909 73.396,135.909 74.946,137.459 74.946,140.54 74.967,140.561 ; 62.807,146.851 65.938,146.851 65.946,146.859 68.996,146.859 69.927,147.79 69.927,148.061 ; 62.807,158.504 62.807,153.881 64.046,152.642 73.396,152.642 74.946,154.192 74.946,157.273 74.967,157.294 ; 62.807,163.584 65.938,163.584 65.946,163.592 68.996,163.592 69.927,164.523 69.927,164.794 ; 124.608,114.62 124.629,114.641 124.629,117.723 126.179,119.273 135.529,119.273 136.768,118.034 136.768,113.41 ; 124.647,131.328 124.668,131.349 124.668,134.43 126.218,135.98 135.568,135.98 136.807,134.741 136.807,130.118 ; 124.658,147.97 124.679,147.991 124.679,151.073 126.229,152.623 135.579,152.623 136.818,151.384 136.818,146.76 ; 124.658,164.82 124.679,164.841 124.679,165.88 128.272,169.473 135.579,169.473 136.818,168.234 136.818,163.61 ; 129.648,107.12 129.648,107.391 130.579,108.323 133.629,108.323 133.637,108.33 136.768,108.33 ; 129.687,123.828 129.687,124.099 130.618,125.03 133.668,125.03 133.676,125.038 136.807,125.038 ; 129.698,140.47 129.698,140.741 130.629,141.673 133.679,141.673 133.687,141.68 136.818,141.68 ; 129.698,157.32 129.698,157.591 130.629,158.523 133.679,158.523 133.687,158.53 136.818,158.53
  other v1: 96.768,88.63 90.768,88.88 93.568,88.88 101.268,88.88 104.368,88.88 107.418,88.93 97.968,89.18 109.668,89.68 99.768,89.78 89.618,90.38 90.118,91.98 89.768,93.78 91.318,95.33 109.818,95.33 89.818,96.73 108.368,97.33 109.418,98.63 90.918,99.08 104.818,99.23 89.918,100.08 92.318,100.08 108.318,100.53 105.768,100.68 109.868,101.83 91.118,102.08 103.718,102.53 92.818,103.83 92.818,104.68 105.618,105.13 92.818,105.58 92.818,106.63 92.818,107.63 105.918,108.53 94.518,108.88 92.818,108.93 104.618,108.98 95.718,109.03 104.468,112.68 105.668,112.68 92.968,114.23 92.968,115.08 108.168,115.38 92.968,115.98 108.168,116.23 105.918,116.58 92.968,117.03 108.168,117.13 92.968,118.03 108.168,118.18 105.268,118.68 108.168,119.18 92.968,119.33 104.118,119.33 105.818,119.58 108.168,120.48 92.968,121.03 108.168,121.28 95.018,121.73 92.968,121.88 96.768,121.98 105.718,122.03 108.168,122.13 92.968,122.78 108.168,123.03 92.968,123.83 108.168,124.08 92.968,124.83 94.518,125.63 104.018,125.68 105.168,125.68 96.768,125.73 108.168,125.78 92.968,126.13 108.168,126.38 96.868,129.18 108.068,129.28 94.168,129.43 105.368,129.48 104.318,129.53 93.018,129.83 108.068,130.13 93.018,130.68 108.068,131.03 93.018,131.58 108.068,132.08 93.018,132.63 108.068,133.08 93.018,133.63 108.068,134.38 94.518,134.53 93.018,134.93 105.468,135.23 104.218,135.38 105.318,136.23 92.968,137.28 108.168,137.63 92.968,138.13 108.168,138.48 105.718,138.68 92.968,139.03 97.218,139.28 98.718,139.28 108.168,139.38 92.968,140.08 108.168,140.43 92.968,141.08 108.168,141.43 105.618,142.33 92.968,142.38 108.168,142.73 97.118,145.83 108.218,145.98 104.218,146.13 105.568,146.18 108.218,146.83 93.018,147.23 108.218,147.73 93.018,148.08 108.218,148.78 93.018,148.98 108.218,149.78 93.018,150.03 93.018,151.03 108.218,151.08 105.468,151.78 108.218,152.18 93.018,152.33 104.118,152.33 105.418,152.68 108.218,153.03 108.218,153.93 93.018,154.23 108.218,154.98 93.018,155.08 96.918,155.83 93.018,155.98 108.218,155.98 98.768,156.03 100.418,156.08 93.018,157.03 108.218,157.28 93.018,158.03 105.718,158.73 104.868,159.18 93.018,159.33 97.118,159.83 92.968,162.18 101.018,162.43 99.118,162.48 96.768,162.78 104.118,162.93 108.218,162.98 92.968,163.03 105.468,163.03 108.218,163.83 92.968,163.93 108.218,164.73 92.968,164.98 108.218,165.78 92.968,165.98 108.218,166.78 92.968,167.28 108.218,168.08 92.518,169.33 98.568,169.93 106.468,170.33 100.468,170.53 94.518,170.63 109.468,171.18 104.768,171.63 98.468,171.98 110.568,172.88 103.918,173.18
  other v2: 96.268,171.33 114.447,172.194 116.147,172.194 114.047,175.894 115.747,175.894 117.947,175.894 104.447,176.294 100.547,176.394 95.647,176.494 102.447,176.494 107.347,177.094 109.947,177.094 92.947,180.594 106.647,180.694 95.547,180.894 101.847,180.994 109.547,180.994 99.247,181.094 87.847,181.294

## Polygon pours and split planes (outlines as drawn)
no net on F.Cu "F.Cu--3" (solid, remove dead copper, pour order 11): 88.918,102.98 110.668,102.93 110.668,87.78 88.918,87.774
no net on F.Cu "F.Cu--2" (solid, remove dead copper, pour order 10): 112.468,184.28 112.417,171.78 108.93,167.625 108.828,87.774 91.68,87.774 91.73,167.47 86.318,171.794 86.318,184.28
no net on F.Cu "F.Cu--1" (solid, remove dead copper, pour order 6): 85.647,181.346 85.743,181.607 86.131,182.059 86.425,182.194 96.263,182.194 96.567,182.055 96.958,181.598 97.047,181.358 97.047,173.294 96.647,172.894 94.372,172.894 93.972,173.294 93.972,175.494 93.572,175.894 86.054,175.894 85.654,176.301
no net on F.Cu "F.Cu-" (solid, remove dead copper, pour order 8): 113.247,175.994 113.647,176.394 118.247,176.394 118.647,175.994 118.647,172.094 118.247,171.694 113.683,171.694 113.284,172.128
no net on B.Cu "B.Cu--3" (solid, remove dead copper, pour order 9): 88.918,102.98 110.668,102.93 110.668,87.78 88.918,87.774
no net on B.Cu "B.Cu--2" (solid, remove dead copper, pour order 12): 112.468,184.28 112.417,171.78 108.93,167.625 108.828,87.774 91.68,87.774 91.73,167.47 86.318,171.794 86.318,184.28
no net on B.Cu "B.Cu--1" (solid, remove dead copper, pour order 5): 85.74,181.427 85.879,181.724 86.322,182.105 86.562,182.192 96.36,182.057 96.684,181.885 96.986,181.447 97.042,181.25 96.668,173.337 96.209,172.96 94.263,173.251 93.927,173.586 93.622,175.572 93.247,175.911 86.05,176.281 85.67,176.697
no net on B.Cu "B.Cu-" (solid, remove dead copper, pour order 7): 113.613,175.998 114.044,176.363 118.243,176.027 118.61,175.591 118.284,172.09 117.851,171.729 113.72,172.09 113.361,172.559

## Silkscreen, mask and mechanical layers (free items; w line width, h text height)
F.SilkS:
  text "KNX_Relay_8CH_v0.2" at 58.597,88.771 h1.5
Edge.Cuts:
  circle w0.254: c124.818,101.03 r1.5
  circle w0.254: c124.818,171.03 r1.5
  circle w0.254: c74.818,101.03 r1.5
  circle w0.254: c74.818,171.03 r1.5
  lines w0.254: 57.568,87.78 142.068,87.78 142.068,184.28 57.568,184.28 57.568,87.78 ; 82.568,103.53 86.068,103.53 86.068,168.03 82.568,168.03 82.568,103.53 ; 114.068,103.53 117.568,103.53 117.568,168.03 114.068,168.03 114.068,103.53
User.2:
  drawing of 2624 lines, arcs and shapes, not listed
  text "1" at 29.583,285.155 h1.85
  text "2" at 79.167,285.149 h1.85
  text "3" at 129.167,285.14 h1.85
  text "4" at 179.167,285.149 h1.85
  text "6" at 279.167,285.145 h1.85
  text "7" at 329.167,285.145 h1.85
  text "8" at 379.167,285.14 h1.85
  text "5" at 231.975,285.091 h1.85
  text "A" at 121.035,276.644 h3.5
  text "A" at 1.667,269.152 h1.85
  text "A" at 406.667,269.152 h1.85
  text "Pcb Sample" at 229.597,262.761 h3.5
  text "(Not Included)" at 226.773,258.229 h3.5
  text "B" at 1.667,219.155 h1.85
  text "B" at 406.667,219.155 h1.85
  text "KESIT A-A" at 254.871,217.803 h3.5
  text "A" at 121.035,211.09 h3.5
  text "C" at 1.667,169.141 h1.85
  text "C" at 406.667,169.141 h1.85
  text "D" at 1.667,119.155 h1.85
  text "D" at 406.667,119.155 h1.85
  text "E" at 1.667,69.155 h1.85
  text "REVISION:" at 392.488,53.815 h1.5
  text "ARTICLE NO:" at 322.372,53.696 h1.32
  text "PROPRIETARY AND CONFIDENTIAL" at 289.469,53.472 h1.06
  text "THE INFORMATION CONTAINED IN THIS" at 289.686,51.52 h1.06
  text "PCB Sample" at 123.569,50.935 h3.5
  text "DRAWING IS THE SOLE PROPERTY OF" at 289.686,50.109 h1.06
  text "ALTINKAYA ENCLOSURES.  ANY" at 289.686,48.698 h1.06
  text "REPRODUCTION IN PART OR AS A WHOLE" at 289.686,47.287 h1.06
  text "Not Included" at 122.6,46.752 h3.5
  text "WITHOUT THE WRITTEN PERMISSION OF" at 289.686,45.876 h1.06
  text "CONTACT:" at 368.379,44.803 h1.5
  text "ALTINKAYA ENCLOSURES IS PROHIBITED." at 289.686,44.465 h1.06
  text "www.altinkaya.com.tr" at 368.178,41.054 h2.38
  text "NAME" at 302.616,40.626 h1.32
  text "DATE" at 315.264,40.626 h1.32
  text "ENCLOSURES FOR ELECTRONICS" at 334.098,40.189 h1.06
  text "10.08.10" at 314.266,37.277 h1.32
  text "DRAWN" at 288.043,36.928 h1.32
  text "String" at 298.966,36.796 h1.32
  text "TITLE:" at 322.438,36.016 h1.32
  text "11.08.10" at 314.433,33.56 h1.32
  text "CHECKED" at 288.103,32.867 h1.32
  text "String" at 301.446,32.738 h1.32
  text "COMMENTS:" at 288.07,29.599 h1.32
  text "Base" at 363.648,29.581 h4.23
  text "F" at 1.667,19.155 h1.85
  text "DWG NO." at 322.555,14.601 h1.32
  text "A3" at 400.921,13.471 h2.91
  text "RT-206_DIN_BASE" at 335.135,12.764 h4.76
  text "MATERIAL:" at 287.826,11.613 h1.32
  text "6" at 279.349,3.461 h1.85
  text "1" at 29.583,3.155 h1.85
  text "2" at 79.167,3.149 h1.85
  text "3" at 129.167,3.14 h1.85
  text "4" at 179.167,3.149 h1.85
  text "5" at 230.096,3.145 h1.85
  text "WEIGHT:" at 289.915,3.075 h1.32
  text "SCALE:1:1" at 322.555,2.633 h1.32
  text "SHEET 1 OF 1" at 367.278,2.473 h1.5
User.1:
  drawing of 7830 lines, arcs and shapes, not listed
  text "1" at 512.814,548.865 h1.85
  text "2" at 562.397,548.86 h1.85
  text "4" at 662.397,548.86 h1.85
  text "6" at 762.397,548.856 h1.85
  text "7" at 812.397,548.856 h1.85
  text "3" at 612.397,548.851 h1.85
  text "8" at 862.397,548.851 h1.85
  text "5" at 715.205,548.802 h1.85
  text "1" at 936.308,541.918 h1.85
  text "2" at 985.891,541.913 h1.85
  text "3" at 1035.891,541.903 h1.85
  text "4" at 1085.891,541.913 h1.85
  text "5" at 1135.891,541.909 h1.85
  text "6" at 1185.891,541.909 h1.85
  text "7" at 1235.891,541.909 h1.85
  text "8" at 1285.891,541.903 h1.85
  text "9" at 1335.891,541.913 h1.85
  text "10" at 1385.266,541.903 h1.85
  text "11" at 1435.475,541.918 h1.85
  text "12" at 1485.058,541.913 h1.85
  text "Button" at 705.628,537.847 h3.5
  text "A" at 605.081,537.7 h3.5
  text "Transparent Panel" at 775.724,537.518 h3.5
  text "A" at 484.897,532.862 h1.85
  text "A" at 889.897,532.862 h1.85
  text "A" at 921.391,514.415 h1.85
  text "A" at 1500.391,514.415 h1.85
  text "Cover" at 824.279,509.466 h3.5
  text "B" at 484.897,482.865 h1.85
  text "B" at 889.897,482.865 h1.85
  text "B" at 921.391,464.418 h1.85
  text "B" at 1500.391,464.418 h1.85
  text "RT-206-A" at 1379.129,460.707 h3.5
  text "Base" at 814.514,460.519 h3.5
  text "Pcb Sample" at 695.36,460.394 h3.5
  text "KESIT A-A" at 754.309,457.011 h3.5
  text "(Not Included)" at 692.536,455.862 h3.5
  text "RT-206-A" at 1210.524,452.868 h3.5
  text "A" at 605.081,452.776 h3.5
  text "C" at 484.897,432.852 h1.85
  text "C" at 889.897,432.852 h1.85
  text "C" at 921.391,414.404 h1.85
  text "C" at 1500.391,414.404 h1.85
  text "D" at 484.897,382.865 h1.85
  text "D" at 889.897,382.865 h1.85
  text "RT-206-B" at 1382.827,377.668 h3.5
  text "RT-206-B" at 1209.145,366.904 h3.5
  text "D" at 921.391,364.418 h1.85
  text "D" at 1500.391,364.418 h1.85
  text "E" at 484.897,332.865 h1.85
  text "REVISION:" at 875.719,317.526 h1.5
  text "ARTICLE NO:" at 805.603,317.407 h1.32
  text "PROPRIETARY AND CONFIDENTIAL" at 772.699,317.183 h1.06
  text "THE INFORMATION CONTAINED IN THIS" at 772.916,315.231 h1.06
  text "E" at 921.391,314.418 h1.85
  text "E" at 1500.391,314.418 h1.85
  text "DRAWING IS THE SOLE PROPERTY OF" at 772.916,313.82 h1.06
  text "ALTINKAYA ENCLOSURES.  ANY" at 772.916,312.409 h1.06
  text "REPRODUCTION IN PART OR AS A WHOLE" at 772.916,310.998 h1.06
  text "WITHOUT THE WRITTEN PERMISSION OF" at 772.916,309.586 h1.06
  text "CONTACT:" at 851.61,308.514 h1.5
  text "ALTINKAYA ENCLOSURES IS PROHIBITED." at 772.916,308.175 h1.06
  text "www.altinkaya.com.tr" at 851.409,304.764 h2.38
  text "NAME" at 785.846,304.337 h1.32
  text "DATE" at 798.494,304.337 h1.32
  text "ENCLOSURES FOR ELECTRONICS" at 817.329,303.899 h1.06
  text "10.08.10" at 797.496,300.988 h1.32
  text "DRAWN" at 771.273,300.639 h1.32
  text "String" at 782.196,300.506 h1.32
  text "TITLE:" at 805.668,299.727 h1.32
  text "11.08.10" at 797.663,297.271 h1.32
  text "CHECKED" at 771.334,296.578 h1.32
  text "String" at 784.677,296.448 h1.32
  text "COMMENTS:" at 771.3,293.31 h1.32
  text "Rail Type Enclosures" at 823.557,292.16 h4.23
  text "RT-206-C" at 1385.531,288.467 h3.5
  text "F" at 484.897,282.865 h1.85
  text "RT-206-C" at 1210.877,280.021 h3.5
  text "DWG NO." at 805.786,278.312 h1.32
  text "A3" at 884.151,277.181 h2.91
  text "RT-206-Assembly" at 820.97,276.243 h4.76
  text "MATERIAL:" at 771.056,275.323 h1.32
  text "6" at 762.58,267.172 h1.85
  text "1" at 512.814,266.865 h1.85
  text "2" at 562.397,266.86 h1.85
  text "3" at 612.397,266.851 h1.85
  text "4" at 662.397,266.86 h1.85
  text "5" at 713.327,266.856 h1.85
  text "WEIGHT:" at 773.146,266.785 h1.32
  text "SCALE:1:1" at 805.786,266.344 h1.32
  text "SHEET 1 OF 1" at 850.509,266.184 h1.5
  text "F" at 921.391,264.418 h1.85
  text "F" at 1500.391,264.418 h1.85
  text "G" at 921.391,214.404 h1.85
  text "G" at 1499.976,214.06 h1.85
  text "RT-206-D" at 1384.093,202.73 h3.5
  text "RT-206-D" at 1210.514,188.943 h3.5
  text "REVISION:" at 1486.559,187.409 h1.5
  text "ARTICLE NO:" at 1416.442,187.29 h1.32
  text "PROPRIETARY AND CONFIDENTIAL" at 1383.539,187.066 h1.06
  text "THE INFORMATION CONTAINED IN THIS" at 1383.756,185.114 h1.06
  text "DRAWING IS THE SOLE PROPERTY OF" at 1383.756,183.703 h1.06
  text "ALTINKAYA ENCLOSURES.  ANY" at 1383.756,182.292 h1.06
  text "REPRODUCTION IN PART OR AS A WHOLE" at 1383.756,180.881 h1.06
  text "WITHOUT THE WRITTEN PERMISSION OF" at 1383.756,179.469 h1.06
  text "CONTACT:" at 1462.45,178.397 h1.5
  text "ALTINKAYA ENCLOSURES IS PROHIBITED." at 1383.756,178.058 h1.06
  text "www.altinkaya.com.tr" at 1462.249,174.647 h2.38
  text "NAME" at 1396.209,174.22 h1.32
  text "DATE" at 1408.454,174.22 h1.32
  text "ENCLOSURES FOR ELECTRONICS" at 1428.169,173.782 h1.06
  text "10.08.10" at 1407.966,170.853 h1.32
  text "String" at 1392.007,170.724 h1.32
  text "DRAWN" at 1382.113,170.522 h1.32
  text "TITLE:" at 1416.508,169.61 h1.32
  text "11.08.10" at 1407.902,167.125 h1.32
  text "String" at 1394.488,167.005 h1.32
  text "CHECKED" at 1382.174,166.461 h1.32
  text "H" at 921.391,164.418 h1.85
  text "COMMENTS:" at 1382.14,163.193 h1.32
  text "Cover" at 1456.606,163.159 h4.23
  text "DWG NO." at 1416.626,148.195 h1.32
  text "A2" at 1494.991,147.079 h2.91
  text "RT-206-TOP_BODY" at 1428.275,146.358 h4.76
  text "MATERIAL:" at 1381.896,145.206 h1.32
  text "8" at 1285.462,137.046 h1.85
  text "9" at 1338.98,137.038 h1.85
  text "1" at 936.308,136.918 h1.85
  text "2" at 985.891,136.913 h1.85
  text "3" at 1035.891,136.903 h1.85
  text "4" at 1085.891,136.913 h1.85
  text "5" at 1135.891,136.909 h1.85
  text "6" at 1185.891,136.909 h1.85
  text "7" at 1235.891,136.909 h1.85
  text "WEIGHT:" at 1383.986,136.668 h1.32
  text "SCALE:1:1" at 1416.626,136.227 h1.32
  text "SHEET 1 OF 1" at 1461.349,136.066 h1.5

## Dimensions
99.812,133.928 to 100.51,87.78 on F.SilkS
142.068,159.094 to 142.068,62.594 on F.Cu
142.068,87.78 to 57.568,87.78 on F.Cu

## Text inside footprints (layer, text, board x,y; h text height)
REF**: F.Cu "T" at 59.671,92.592 h1; B.Cu "B" at 63.724,92.592 h1